# EAGLE board Touch Menu Board (EAGLE 6.4)
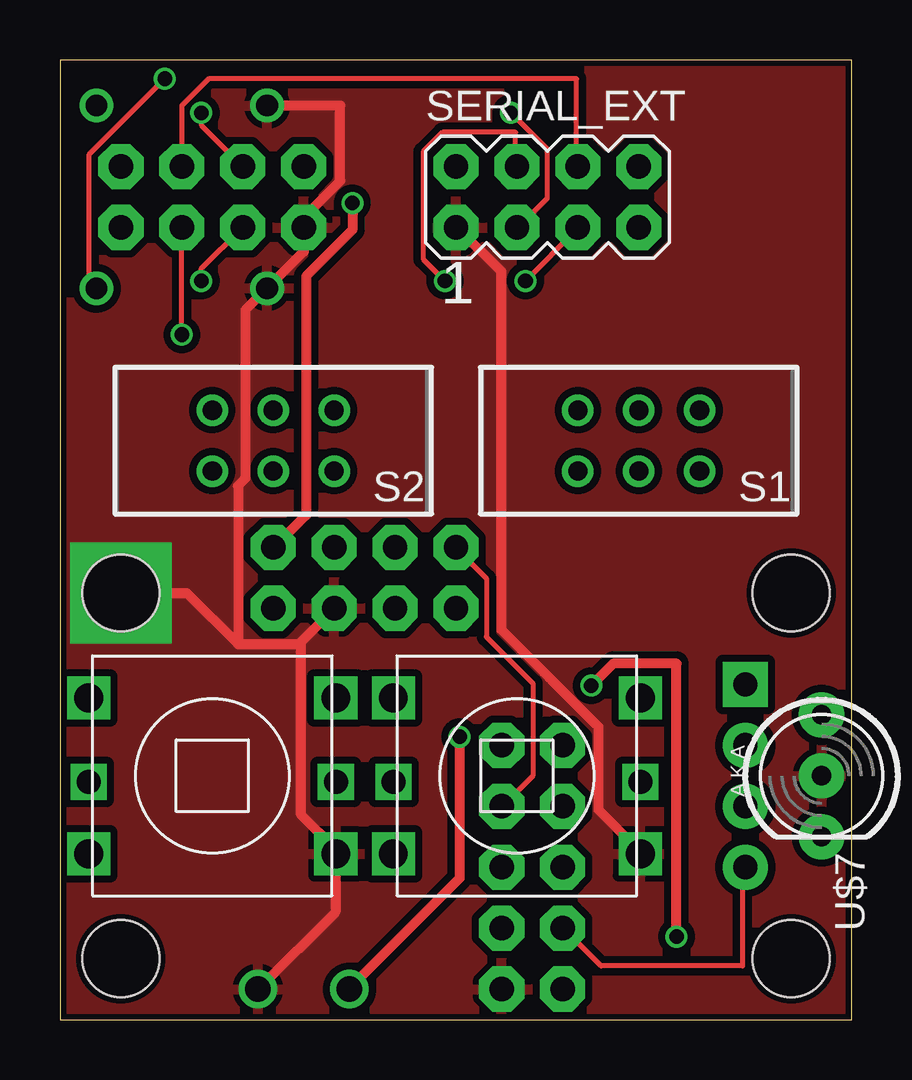
[diagram p0: board, top side]
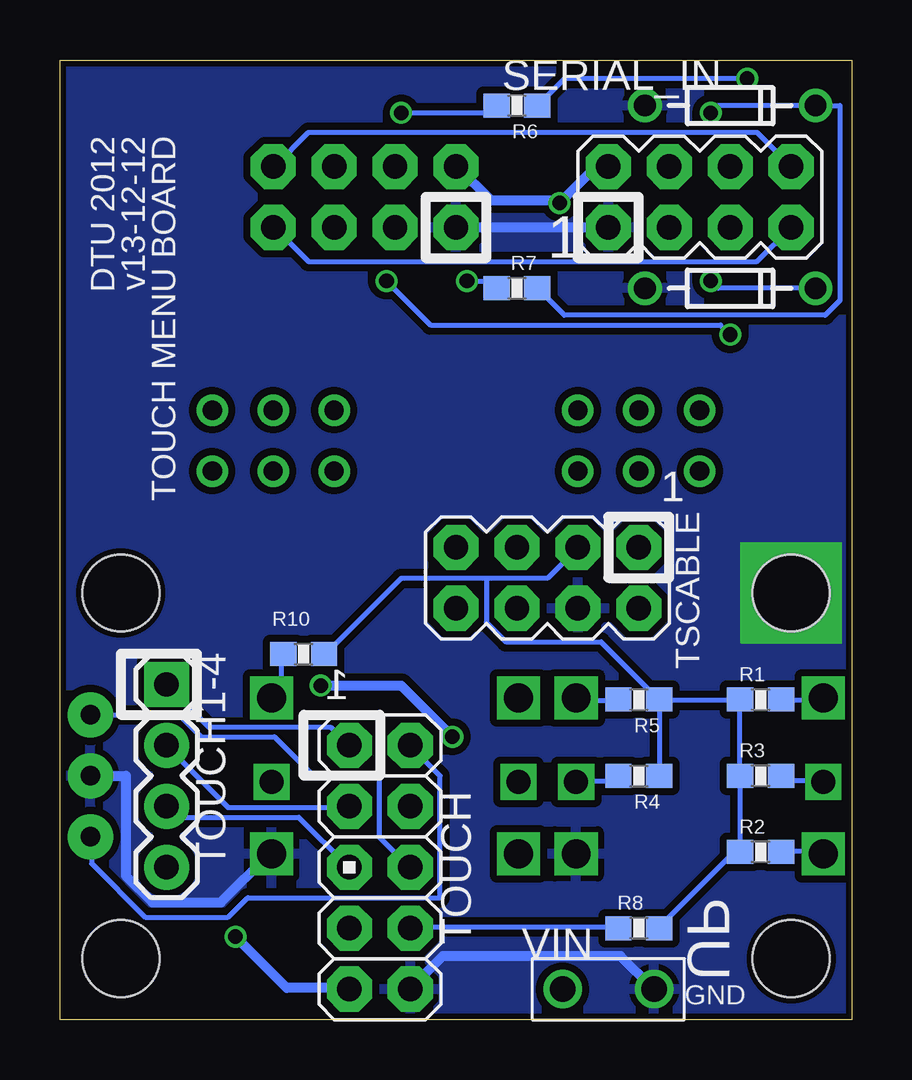
[diagram p1: board, bottom side, seen from below]

Size 33.02 x 40 mm. Coordinates in mm from the lower left corner, seen from the top.
Outline: 0,0 33.02,0 33.02,40 0,40 0,0
Copper layers (1*16): Top 0.035mm / dielectric 1.5mm / Bottom 0.035mm
Design rules "default": minimum track width 6mil, minimum drill 12mil, track to track 6mil, track to pad 6mil, pad to pad 6mil, via to via 6mil, smd to smd 0mil, copper to edge 10mil, drill to drill 10mil, minimum pad ring 10mil, minimum via ring 6mil, stop-mask expansion 2mil, vias tented up to drill 100mil, thermal gap 10mil
Net classes: 0 default: width 0.203 mm, drill 0.61 mm, clearance 0.203 mm; 1 Power: width 0.406 mm, drill 0.61 mm, clearance 0.305 mm
Holes 3.2 mm at 2.54,2.54 30.48,2.54 2.54,17.78 30.48,17.78

## Footprints (pad centres in the part's own frame; a part is rotated, then mirrored left to right if it is on the bottom)
AVR_ICSP = drill 1.016 pad 1.88 octagon: 1 -1.27,5.08; 2 1.27,5.08; 3 -1.27,2.54; 4 1.27,2.54; 5 -1.27,0; 6 1.27,0; 7 -1.27,-2.54; 8 1.27,-2.54; 9 -1.27,-5.08; 10 1.27,-5.08
NAV-SWITCH-5WAY = drill 1.2 square: PIN1 -5.15,3.25; PIN3 -5.15,-3.25; PIN4 5.15,-3.25; PIN6 5.15,3.25 | drill 1 square: PIN2 -5.15,-0.25; PIN5 5.15,-0.25
0603-RES = smd 1.1 x 1: 1 -0.85,0; 2 0.85,0
TECONNECTIVITY-DPDT = drill 0.8: P$1 1.27,2.54; P$2 1.27,0; P$3 1.27,-2.54; P$4 -1.27,2.54; P$5 -1.27,0; P$6 -1.27,-2.54
2X4 = drill 1.016 pad 1.88 octagon: 1 -3.81,-1.27; 2 -3.81,1.27; 3 -1.27,-1.27; 4 -1.27,1.27; 5 1.27,-1.27; 6 1.27,1.27; 7 3.81,-1.27; 8 3.81,1.27
1X04 = drill 1.016 pad 1.88 square: 1 0,0 | drill 1.016 pad 1.88: 2 2.54,0; 3 5.08,0; 4 7.62,0
DIODE-ZENER = drill 0.9: P$1 -3.556,0; P$2 3.556,0
LED5MM-BICOLOR = drill 0.813 pad 1.88: A2 2.54,0; A3 -2.54,0; K1 0,0
1X02_BIG = drill 1.067: P$1 0,0; P$2 3.81,0

## Placement (x,y rotation side)
JP7  M05X2PTH  [AVR_ICSP]  19.68,6.35 0 bottom
MENU  NAV-SWITCH-5WAYCNK_LOCK  [NAV-SWITCH-5WAY]  6.35,10.16 0 top
R1  820  [0603-RES]  3.81,13.34 0 bottom
R2  1K5  [0603-RES]  3.81,6.99 0 bottom
R3  3K3  [0603-RES]  3.81,10.16 0 bottom
R4  330  [0603-RES]  8.89,10.16 180 bottom
R5  2K  [0603-RES]  8.89,13.34 180 bottom
R6  100R  [0603-RES]  13.97,38.1 180 bottom
R7  100R  [0603-RES]  13.97,30.48 0 bottom
R8  15K  [0603-RES]  8.89,3.81 0 bottom
R10  100R  [0603-RES]  22.86,15.24 180 bottom
S1  SWITCH-DPDTPTH1  [TECONNECTIVITY-DPDT]  24.13,24.13 90 top
S2  SWITCH-DPDTPTH1  [TECONNECTIVITY-DPDT]  8.89,24.13 90 top
SERIAL_EXT  M04X2  [2X4]  20.32,34.29 0 top
SERIAL_IN  M04X2  [2X4]  6.35,34.29 0 bottom
SRC  NAV-SWITCH-5WAYCNK_LOCK  [NAV-SWITCH-5WAY]  19.05,10.16 0 top
TOUCH1-4  [1X04]  28.57,13.97 270 bottom
TSCABLE  M04X2  [2X4]  12.7,18.41 180 bottom
U$2  5V1  [DIODE-ZENER]  5.08,30.48 180 bottom
U$4  5V1  [DIODE-ZENER]  5.08,38.1 180 bottom
U$7  LEDBICOLOR-AKA  [LED5MM-BICOLOR]  31.75,10.16 270 top
VIN  [1X02_BIG]  8.26,1.27 180 bottom

## Library data of the parts
JP7 R1-R8 R10 SERIAL_EXT SERIAL_IN TOUCH1-4 TSCABLE U$2 U$4 VIN = SparkFun
MENU S1 S2 SRC U$7 = SKAARHOJ

## Nets
5V [Power]: SERIAL_EXT.2 SERIAL_IN.2 TSCABLE.1
A0: JP7.1 TOUCH1-4.1
A1: JP7.3 TOUCH1-4.2
A2: JP7.5 TOUCH1-4.3
A3: JP7.7 TOUCH1-4.4
DISP_DATA_OUT: SERIAL_EXT.6 SERIAL_IN.6
GND [Power]: JP7.10 MENU.PIN4 SERIAL_EXT.1 SERIAL_IN.1 SRC.PIN4 TSCABLE.4 U$2.P$2 U$4.P$2 U$7.K1 VIN.P$1
I2C_SCL: R7.2 SERIAL_IN.4 U$4.P$1
I2C_SDA: R6.1 SERIAL_IN.3 U$2.P$1
IR: TSCABLE.2
KEYIN: R1.1 R2.1 R3.1 R4.1 R5.1 R8.2 R10.1 TSCABLE.3
LEDPWR: TSCABLE.5
N$1: R6.2 SERIAL_EXT.3
N$2: MENU.PIN1 R1.2
N$3: MENU.PIN3 R2.2
N$4: TSCABLE.8
N$5: MENU.PIN2 R3.2
N$6: MENU.PIN5 R4.2
N$7: JP7.2 U$7.A2
N$8: JP7.6 U$7.A3
N$9: MENU.PIN6 R5.2
N$11: JP7.8 R8.1
N$13: R10.2 SRC.PIN6
N$14: R7.1 SERIAL_EXT.4
PWRLED1: TSCABLE.6
PWRLED2: JP7.4 TSCABLE.7
SDI_MOSI: SERIAL_EXT.8 SERIAL_IN.8
SDI_SCLK: SERIAL_EXT.7 SERIAL_IN.7
SLIDER_IN: SERIAL_EXT.5 SERIAL_IN.5
VIN [Power]: JP7.9 VIN.P$2

## Tracks (layer width: path | path; a pad name or v marks a point on that pad's centre or on a via)
5V  (via drill 0.61)
  Top 0.406: v12.19,34.04 12.19,32.92 10.26,30.99 10.26,21.03 8.94,19.71 TSCABLE.1
  Bottom 0.406: SERIAL_IN.2 10.67,35.56 v12.19,34.04 12.29,34.14 15.04,34.14 16.46,35.56 SERIAL_EXT.2
A0
  Bottom 0.203: JP7.1 21.03,11.48 21.74,12.19 26.82,12.19 28.55,13.92 TOUCH1-4.1
A1
  Bottom 0.203: JP7.3 21.03,8.84 26.01,8.84 28.55,11.38 TOUCH1-4.2
A2
  Bottom 0.203: JP7.5 21.03,6.4 23.06,8.43 28.14,8.43 28.55,8.84 TOUCH1-4.3
A3
  Top 0.203: JP7.7 21.03,3.76 22.55,2.23 28.45,2.23 28.45,6.2 28.55,6.3 TOUCH1-4.4
DISP_DATA_OUT
  Top 0.203: SERIAL_IN.6 5.08,38.1 6.2,39.22 21.54,39.22 21.54,35.56 SERIAL_EXT.6
GND  (via drill 3.2)
  Top 0.406: VIN.P$1 8.33,1.32 11.48,4.47 11.48,6.91 MENU.PIN4 11.48,7.11 10.06,8.53 10.06,15.75 | 10.06,15.75 11.38,17.07 TSCABLE.4 | U$4.P$2 11.68,38.1 11.68,34.95 10.26,33.53 10.26,33.12 SERIAL_IN.1 10.16,32 U$2.P$2 7.72,29.57 7.72,22.55 7.42,22.25 7.42,15.65 | SRC.PIN4 24.18,7.01 22.45,8.74 22.45,12.19 18.39,16.26 18.39,31.19 16.56,33.02 SERIAL_EXT.1 | 7.42,15.65 9.96,15.65 10.06,15.75 | v2.54,17.78 5.28,17.78 7.42,15.65
  Bottom 0.406: JP7.10 18.39,1.32 17.07,2.64 9.65,2.64 8.33,1.32 VIN.P$1 | U$7.K1 30.28,10.16 30.28,5.99 29.16,4.88 26.31,4.88 24.28,6.91 SRC.PIN4 | SERIAL_IN.1 SERIAL_EXT.1
  pour Bottom: 0,0 34.29,0 34.29,40.64 0,40.64
  pour Top: 0,0 0,40.64 34.29,40.64 34.29,0
I2C_SCL  (via drill 0.61)
  Top 0.203: SERIAL_IN.4 5.89,37.29 v5.89,37.8
  Bottom 0.203: R7.2 13.11,30.48 11.99,29.36 1.12,29.36 0.51,29.97 0.51,38.1 U$4.P$1 5.59,38.1 v5.89,37.8
I2C_SDA  (via drill 0.61)
  Top 0.203: v4.37,39.22 1.22,36.07 1.22,30.79 U$2.P$1 | SERIAL_IN.3 5.89,31.29 v5.89,30.79
  Bottom 0.203: v4.37,39.22 11.99,39.22 13.11,38.1 R6.1 | v5.89,30.79 5.59,30.48 U$2.P$1
KEYIN
  Bottom 0.203: R4.1 8.03,10.16 8.03,13.31 R5.1 | 4.67,10.16 4.67,7.01 R2.1 4.78,7.01 4.88,7.01 8.03,3.86 R8.2 | 4.67,10.16 4.67,13.31 R1.1 4.78,13.31 7.92,13.31 R5.1 | 4.67,10.16 R3.1 | 15.24,18.39 12.7,18.39 11.48,19.61 TSCABLE.3 | 15.24,18.39 18.8,18.39 21.95,15.24 R10.1 | 15.24,18.39 15.24,16.56 14.43,15.75 10.46,15.75 8.13,13.41 R5.1
N$1  (via drill 0.61)
  Top 0.203: v18.8,37.8 20.32,36.27 20.32,34.24 19.1,33.02 SERIAL_EXT.3
  Bottom 0.203: v18.8,37.8 15.14,37.8 14.83,38.1 R6.2
N$2
  Bottom 0.203: R1.2 2.95,13.31 1.22,13.31 MENU.PIN1
N$3
  Bottom 0.203: R2.2 2.95,7.01 1.22,7.01 MENU.PIN3
N$5
  Bottom 0.203: R3.2 2.95,10.16 2.74,9.96 1.22,9.96 MENU.PIN2
N$6
  Bottom 0.203: R4.2 9.75,10.16 9.96,9.96 11.48,9.96 MENU.PIN5
N$7
  Bottom 0.203: JP7.2 18.39,11.38 17.17,10.16 17.17,5.08 25.2,5.08 26.01,4.27 29.46,4.27 31.7,6.5 31.7,7.62 U$7.A2
N$8
  Bottom 0.203: U$7.A3 28.04,12.7 27.13,11.79 24.08,11.79 22.45,10.16 19.71,10.16 19.71,7.62 18.49,6.4 JP7.6
N$9
  Bottom 0.203: R5.2 9.75,13.31 11.48,13.31 MENU.PIN6
N$11
  Bottom 0.203: R8.1 9.75,3.86 18.39,3.86 JP7.8
N$13
  Bottom 0.203: R10.2 23.77,15.24 23.77,13.41 24.18,13.41 SRC.PIN6
N$14  (via drill 0.61)
  Top 0.203: v16.05,30.79 15.14,31.7 15.14,36.17 15.95,36.98 19,36.98 19,35.56 SERIAL_EXT.4
  Bottom 0.203: v16.05,30.79 15.14,30.79 14.83,30.48 R7.1
PWRLED2
  Top 0.203: JP7.4 18.49,8.94 19.71,10.16 19.71,14.02 17.78,15.95 17.78,18.39 16.56,19.61 TSCABLE.7
SDI_MOSI
  Bottom 0.203: SERIAL_IN.8 3.96,36.98 22.66,36.98 24.08,35.56 SERIAL_EXT.8
SDI_SCLK
  Bottom 0.203: SERIAL_IN.7 3.96,31.6 22.66,31.6 24.08,33.02 SERIAL_EXT.7
SLIDER_IN  (via drill 0.61)
  Top 0.203: v5.08,28.55 SERIAL_IN.5 | v19.41,30.79 21.54,32.92 21.54,33.02 SERIAL_EXT.5
  Bottom 0.203: v5.08,28.55 5.49,28.96 17.58,28.96 v19.41,30.79
VIN  (via drill 0.61)
  Top 0.406: v16.66,11.79 16.66,5.89 12.09,1.32 VIN.P$2 | v22.15,13.92 23.06,14.83 25.7,14.83 v25.7,3.45
  Bottom 0.406: v16.66,11.79 18.8,13.92 v22.15,13.92 | v25.7,3.45 23.57,1.32 21.03,1.32 JP7.9

## Text on the board
Crop: Fusion: 61063
_tsilk: 1
_bsilk: TOUCH MENU BOARD | v13-12-12 | DTU 2012 | 1 | 1 | 1 | TOUCH | UP | VIN | GND